# Altium PCB ltk-mw_center_protractor.PcbDoc
Units mm, origin at the board's own origin, x right, y up, seen from the top; angles counter-clockwise.
Board outline 92.51 x 92.51 mm, 2 copper layers (Top Layer, Bottom Layer), stack 1.569 mm thick; 1 components, 0 nets, 3 pads, 0 vias.
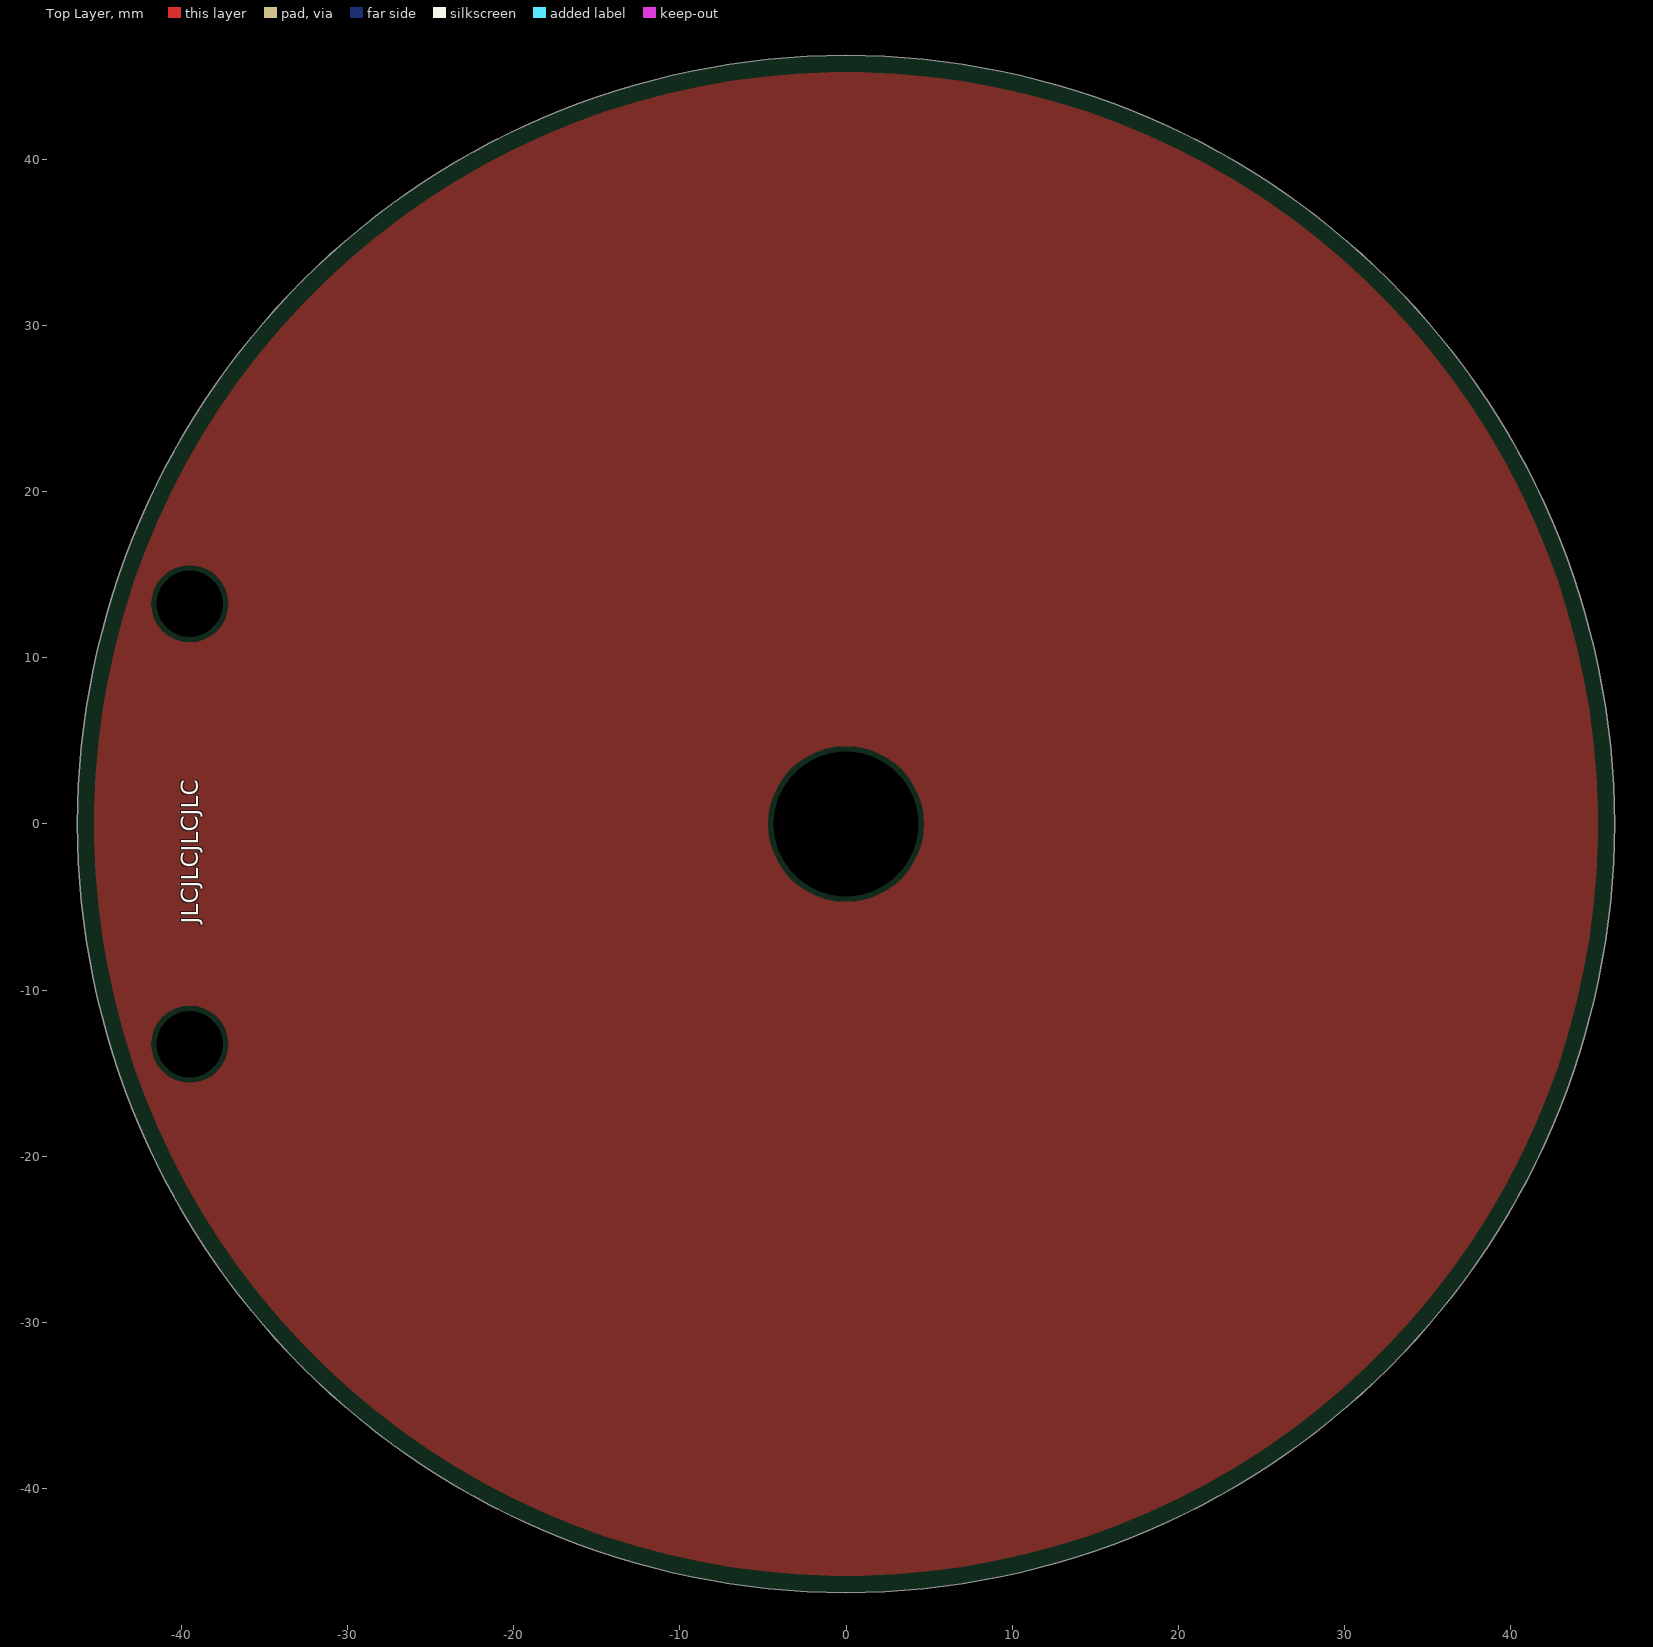
[diagram p0: Top Layer view]
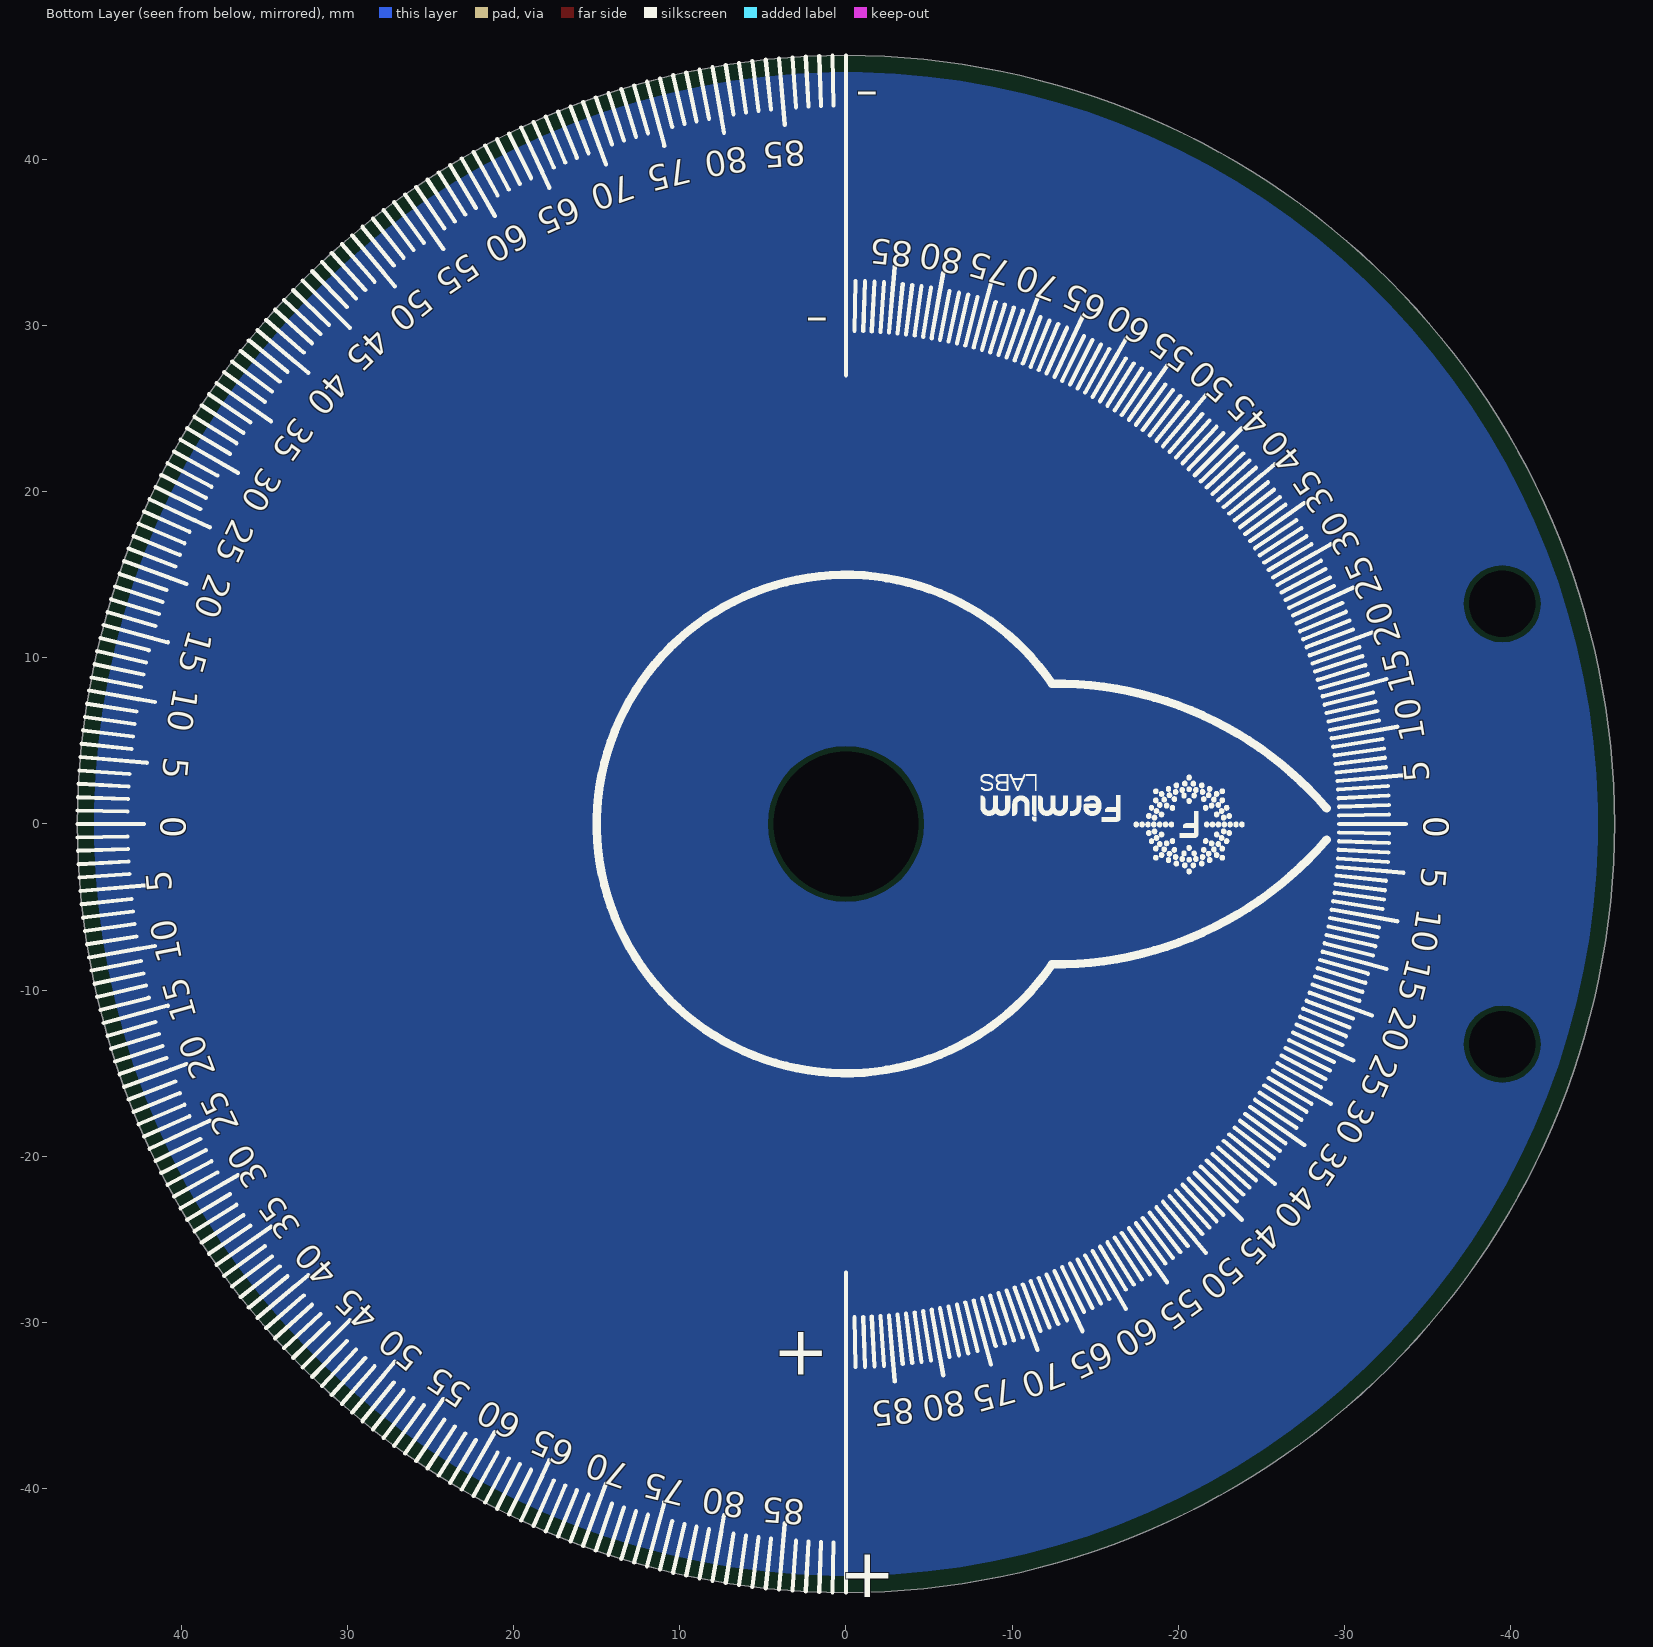
[diagram p1: Bottom Layer view, seen from below]

## Layer stack, top to bottom
Top Solder: solder mask 0.0254, SM-001, Dk 4
Top Layer: signal copper 0.035
Dielectric 1: core 1.4986, Core-043, Dk 4.3
Bottom Layer: signal copper 0.035
Bottom Solder: solder mask 0.0254, SM-001, Dk 4

## Board outline
-46.257,0 ccw(c0,0) 0,-46.257 ccw(c0,0) 46.257,0 ccw(c0,0) 0,46.257 ccw(c0,0)

## Design rules (kind name [scope] priority, off if disabled: settings)
AcuteAngle [All] p1: minimum=6.00000000000000E+0001 checktracksonly=TRUE
AssemblyTestPointUsage [(not InNetClass('NOTESTPOINTS'))] p1: allowmultiple=TRUE
AssemblyTestPointUsage AssemblyTestPointUsageN [InNetClass('NOTESTPOINTS')] p2: valid=2 allowmultiple=TRUE
AssemblyTestpoint [All] p1: testpointundercomponent=TRUE minsize=0.8 maxsize=2 preferedsize=1 minholesize=0 maxholesize=0.35 preferedholesize=0 testpointgrid=1.27 usegrid=FALSE gridoriginx=87.5 gridoriginy=62.5 gridtolerance=0 allowsidetop=TRUE minspacing=2.54 // Zollner
BoardOutlineClearance BoardCopperOutlineClearance [(OnLayer('Top Layer') OR OnLayer('Bottom Layer') )] p1: gap=0.5 ignorepadtopadclearanceinfootprint=FALSE except(1: Poly-OutlineEdge Region-OutlineEdge; 1.5: SMDPad-OutlineEdge THPad-OutlineEdge)
Clearance PadToViaClearance [IsVia and not IsComponentVia vs IsPad] p1: gap=0.025 ignorepadtopadclearanceinfootprint=TRUE
Clearance "Clearance NOTSELV-SELV" [InNetClass('NOTSELV') vs NOT InNetClass('NOTSELV')] p2: gap=6 ignorepadtopadclearanceinfootprint=FALSE // according to previous calio PCB
Clearance "Clearance (FAB)" [All] p3: gap=0.203 ignorepadtopadclearanceinfootprint=TRUE except(0.305: Arc-Poly Track-Poly SMDPad-Poly THPad-Poly Via-Poly Fill-Poly Poly-Poly)
ComponentClearance ComponentClearance_NetTie [((ObjectKind = 'Component') And (ComponentType = 'Net Tie')) Or (Footprint = 'StarPoint') Or (Footprint like 'NetTieVia*')] p1: gap=-3.81 collisioncheckmode=3 verticalgap=-3.81 showdistances=FALSE
ComponentClearance [All] p2: gap=0.254 collisioncheckmode=3 verticalgap=0.254 showdistances=FALSE
DiffPairsRouting [All] p1: maxlimit=1.27 minlimit=0.203 mostfreqgap=0.203 toplayer_minwidth=0.152 toplayer_maxwidth=2.54 toplayer_prefwidth=0.254 bottomlayer_minwidth=0.152 bottomlayer_maxwidth=2.54 bottomlayer_prefwidth=0.254 maxuncoupledlength=12.7
FabricationTestPointUsage [All] p1: valid=2 allowmultiple=FALSE
FabricationTestpoint [All] p1: side=3 testpointundercomponent=TRUE minsize=1.016 maxsize=2.54 preferedsize=1.524 minholesize=0 maxholesize=1.016 preferedholesize=0.813 testpointgrid=0.025 allowsidetop=TRUE allowsidebottom=TRUE usegrid=FALSE gridtolerance=0
HoleSize [All] p1: absolutevalues=TRUE maxlimit=6.35 minlimit=0.3 maxpercent=80.000 minpercent=20.000 // Zollner
HoleToHoleClearance HoleToHoleClearance_NetTieVia [InPadClass('NetTieVias') vs InPadClass('NetTieVias')] p1: gap=0 allowstackedmicrovias=TRUE
HoleToHoleClearance [All] p2: gap=0.25 allowstackedmicrovias=TRUE // Zollner
MinimumAnnularRing [All] p1: minimumring=0.15 // PCBWAY
MinimumSolderMaskSliver [All] p1: minsoldermaskwidth=0.2 // Zollner
PlaneClearance PlaneClearance_1 [All] p1: clearance=0.508
PlaneConnect [All] p1: pad.planeconnectstyle=Relief pad.reliefexpansion=0.508 pad.reliefentries=4 pad.reliefconductorwidth=0.254 pad.reliefairgap=0.254 via.planeconnectstyle=Direct via.reliefexpansion=0.508 via.reliefentries=4 via.reliefconductorwidth=0.254 via.reliefairgap=0.254
PolygonConnect [All] p1: thpad.connectstyle=Relief thpad.reliefconductorwidth=0.254 thpad.reliefentries=4 thpad.polygonreliefangle="90 Angle" thpad.airgapwidth=0.254 smdpad.connectstyle=Relief smdpad.reliefconductorwidth=0.254 smdpad.reliefentries=4 smdpad.polygonreliefangle="90 Angle" smdpad.airgapwidth=0.254 via.connectstyle=Direct via.reliefconductorwidth=0.254 via.reliefentries=4 via.polygonreliefangle="90 Angle" via.airgapwidth=0.254
RoutingVias [All] p1: holewidth=0.35 width=0.7 viastyle="Through Hole" minholewidth=0.3 minwidth=0.6 maxholewidth=1.27 maxwidth=1.27
SMDEntry [not IsTestpoint] p1: side=TRUE corner=TRUE anyangle=FALSE
SMDNeckDown [not IsTestpoint] p1: percent=90.000
SMDToCorner [All] p1: distance=10000
SMDToPlane [All] p1: distance=0
ShortCircuit [All vs not IsBoardCutoutRegion] p1: allowed=FALSE
SilkToSolderMaskClearance [IsPad] p1: minsilkscreentomaskgap=0.127 clearancetoexposedcopper=TRUE
SolderMaskExpansion [All] p1: expansion=0.05 // Zollner
SolderMaskExpansion SolderMaskExpansionToHoles [All] p2: expansion=0.1 soldermaskfromhole=TRUE // Zollner
UnRoutedNet [All] p1: checkbadconnections=TRUE
Width [All] p1: maxlimit=12.7 minlimit=0.203 preferedwidth=0.254
16 further rules are at their usual default settings.

## Components (designator, comment, footprint, x,y, rotation, side; value= is the part's Value field where it differs from the comment)
? "Comment" frm-med -24,3 r0 top

## Footprints (in the part's own frame and the unit in brackets; to place one, negate y for a bottom-side part, rotate by r counter-clockwise, add the part's x,y. Pads: shape width x height; smd on the part's side, far side on the other; paste and mask are expansions set on the pad)
frm-med [mm]

## Free pads (board coordinates)
  round 0 hole 8.75 unplated mask+0: 1(0,0)
  round 0 hole 4 unplated mask+0: 2(-39.5,13.25) 3(-39.5,-13.25)

## Nets (pads, with @x,y where several pads share a name; then routed paths per layer and width w, separated by ;. In a path a pad name is that pad's centre, name@x,y a point inside that pad or via, vN(x,y) a via of type N, cw(c..) or ccw(c..) an arc to the next point about the centre after c; other vN are vias at no path point)

## Polygon pours and split planes (outlines as drawn)
no net on Top Layer "NONET_L01_P002" (solid, pour order 2): -46.257,0 ccw(c0,0) 0,-46.257 ccw(c0,0) 46.257,0 ccw(c0,0) 0,46.257 ccw(c0,0)
no net on Bottom Layer "NONET_L02_P000" (solid, pour order 0): -46.257,0 ccw(c0,0) 0,-46.257 ccw(c0,0) 46.257,0 ccw(c0,0) 0,46.257 ccw(c0,0)

## Silkscreen, mask and mechanical layers (free items; w line width, h text height)
Top Overlay:
  text "JLCJLCJLCJLC" at -39,-6 h1 r90
Bottom Overlay:
  drawing of 437 lines, arcs and shapes, not listed
  text "-" at -2,46 h5.08 r180
  text "85" at 2.511,41.677 h2.54 r175.9
  text "80" at 6.134,41.3 h2.54 r170.9
  text "75" at 9.71,40.608 h2.54 r165.9
  text "70" at 13.212,39.607 h2.54 r160.9
  text "65" at 16.614,38.305 h2.54 r155.9
  text "60" at 19.889,36.711 h2.54 r150.9
  text "85" at -4.147,35.512 h2.54 r185.9
  text "80" at -7.227,35.015 h2.54 r190.9
  text "55" at 23.013,34.838 h2.54 r145.9
  text "75" at -10.251,34.252 h2.54 r195.9
  text "70" at -13.197,33.228 h2.54 r200.9
  text "50" at 25.962,32.7 h2.54 r140.9
  text "-" at 1,32.4 h5.08 r180
  text "65" at -16.043,31.952 h2.54 r205.9
  text "60" at -18.767,30.432 h2.54 r210.9
  text "45" at 28.713,30.312 h2.54 r135.9
  text "55" at -21.348,28.68 h2.54 r215.9
  text "40" at 31.246,27.694 h2.54 r130.9
  text "50" at -23.766,26.711 h2.54 r220.9
  text "35" at 33.541,24.866 h2.54 r125.9
  text "45" at -26.004,24.538 h2.54 r225.9
  text "40" at -28.043,22.178 h2.54 r230.9
  text "30" at 35.58,21.848 h2.54 r120.9
  text "35" at -29.869,19.65 h2.54 r235.9
  text "25" at 37.349,18.664 h2.54 r115.9
  text "30" at -31.468,16.971 h2.54 r240.9
  text "20" at 38.834,15.338 h2.54 r110.9
  text "25" at -32.828,14.164 h2.54 r245.9
  text "15" at 40.023,11.895 h2.54 r105.9
  text "20" at -33.937,11.249 h2.54 r250.9
  text "10" at 40.907,8.361 h2.54 r100.9
  text "15" at -34.789,8.249 h2.54 r255.9
  text "10" at -35.375,5.185 h2.54 r260.9
  text "5" at 41.55,4.112 h2.54 r95
  text "5" at -35.655,2.643 h2.54 r265
  text "0" at -34.25,0.475 h2.54 r90
  text "0" at -34.25,0.475 h2.54 r90
  text "0" at 41.75,0.475 h2.54 r90
  text "0" at 41.75,0.475 h2.54 r90
  text "5" at -34.161,-2.512 h2.54 r95
  text "5" at 40.055,-3.981 h2.54 r265
  text "10" at -33.894,-4.948 h2.54 r99.1
  text "15" at -33.334,-7.883 h2.54 r104.1
  text "10" at 39.434,-8.078 h2.54 r259.1
  text "20" at -32.52,-10.758 h2.54 r109.1
  text "15" at 38.58,-11.484 h2.54 r254.1
  text "25" at -31.459,-13.552 h2.54 r114.1
  text "20" at 37.432,-14.802 h2.54 r249.1
  text "30" at -30.158,-16.242 h2.54 r119.1
  text "25" at 36,-18.009 h2.54 r244.1
  text "35" at -28.627,-18.809 h2.54 r124.1
  text "30" at 34.293,-21.078 h2.54 r239.1
  text "40" at -26.879,-21.232 h2.54 r129.1
  text "45" at -24.926,-23.494 h2.54 r134.1
  text "35" at 32.326,-23.986 h2.54 r234.1
  text "50" at -22.784,-25.577 h2.54 r139.1
  text "40" at 30.112,-26.712 h2.54 r229.1
  text "55" at -20.468,-27.465 h2.54 r144.1
  text "60" at -17.996,-29.145 h2.54 r149.1
  text "45" at 27.669,-29.235 h2.54 r224.1
  text "+" at 1,-29.6 h5.08 r180
  text "65" at -15.388,-30.602 h2.54 r154.1
  text "50" at 25.016,-31.535 h2.54 r219.1
  text "70" at -12.662,-31.827 h2.54 r159.1
  text "75" at -9.84,-32.81 h2.54 r164.1
  text "80" at -6.943,-33.542 h2.54 r169.1
  text "55" at 22.172,-33.596 h2.54 r214.1
  text "85" at -3.993,-34.02 h2.54 r174.1
  text "60" at 19.16,-35.4 h2.54 r209.1
  text "65" at 16.002,-36.936 h2.54 r204.1
  text "70" at 12.722,-38.19 h2.54 r199.1
  text "75" at 9.345,-39.153 h2.54 r194.1
  text "80" at 5.897,-39.819 h2.54 r189.1
  text "85" at 2.404,-40.181 h2.54 r184.1
  text "+" at -3,-43 h5.08 r180
Mechanical 1:
  the board outline again, w0.254